# Altium PCB WPT_FPC_XCM_Change(1)(1).pcbdoc
Units mil, origin at the board's own origin, x right, y up, seen from the top; angles counter-clockwise.
Board outline 236.22 x 785.32 mil, 4 copper layers (Top Layer, GND, PWR, Bottom Layer); 14 components, 13 nets, 35 pads, 32 vias.
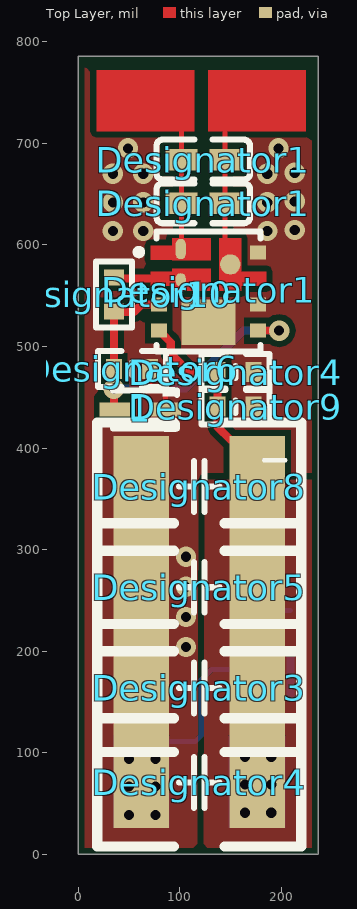
[diagram p0: Top Layer view]
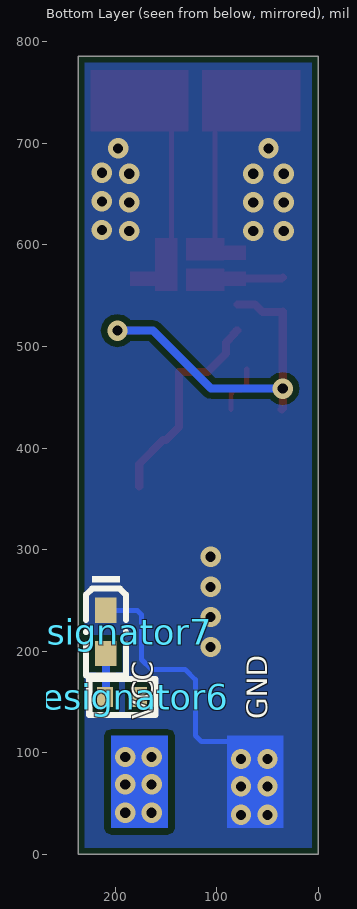
[diagram p1: Bottom Layer view, seen from below]
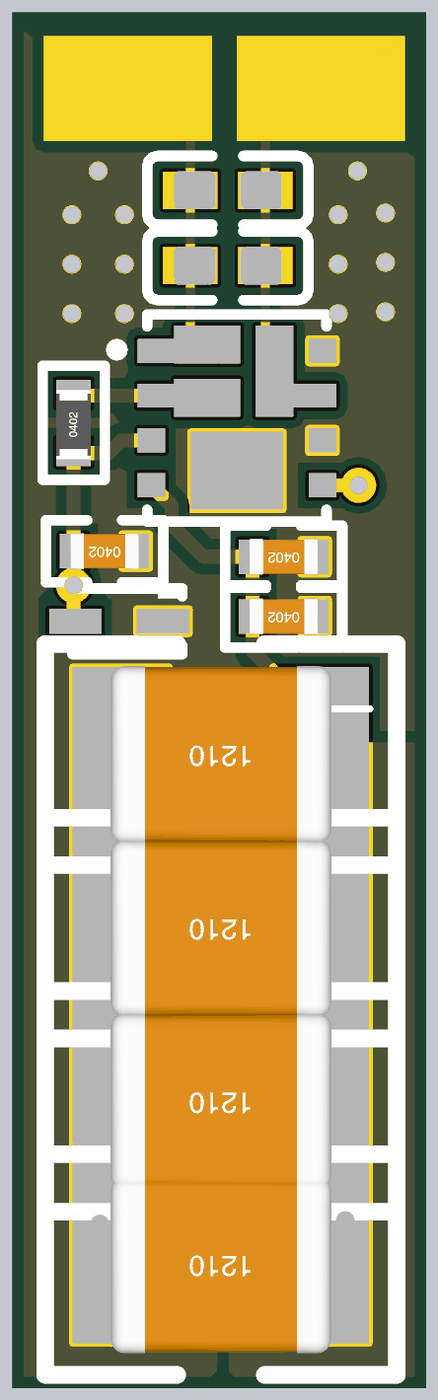
[diagram p2: 3D render of the assembled board from above, using the file's embedded part models]

## Layer stack, top to bottom
Top Solder Mask Layer: solder mask 0.4, Solder Resist, Dk 3.5
Top Layer: signal copper 1.4
Dielectric1: dielectric 12.6, FR-4, Dk 4.8
GND: signal copper 1.4
Dielectric2: dielectric 12.6, FR-4, Dk 4.8
PWR: signal copper 1.4
Dielectric3: dielectric 12.6, FR-4, Dk 4.8
Bottom Layer: signal copper 1.4
Bottom Solder Mask Layer: solder mask 0.4, Solder Resist, Dk 3.5

## Board outline
0,0.3 0,785.61 236.22,785.61 236.22,0.3

## Design rules (kind name [scope] priority, off if disabled: settings)
BoardOutlineClearance copperThickness1oz_1 [All] p1: gap=10 ignorepadtopadclearanceinfootprint=FALSE except(0: Arc-SplitContinuation Track-SplitContinuation SMDPad-SplitContinuation THPad-SplitContinuation Via-SplitContinuation Fill-SplitContinuation Poly-SplitContinuation Region-SplitContinuation Text-SplitContinuation; 6: Track-OutlineEdge Track-CutoutEdge SMDPad-OutlineEdge SMDPad-CutoutEdge THPad-OutlineEdge THPad-CutoutEdge Via-OutlineEdge Via-CutoutEdge Fill-OutlineEdge Fill-CutoutEdge Poly-OutlineEdge Region-OutlineEdge Region-CutoutEdge Text-OutlineEdge)
BoardOutlineClearance copperThickness2oz_1 [All] p2: gap=10 ignorepadtopadclearanceinfootprint=FALSE except(0: Arc-SplitContinuation Track-SplitContinuation SMDPad-SplitContinuation THPad-SplitContinuation Via-SplitContinuation Fill-SplitContinuation Poly-SplitContinuation Region-SplitContinuation Text-SplitContinuation; 6: SMDPad-CutoutEdge THPad-CutoutEdge Via-CutoutEdge Fill-CutoutEdge Region-CutoutEdge; 11.8: Track-OutlineEdge Track-CutoutEdge SMDPad-OutlineEdge THPad-OutlineEdge Via-OutlineEdge Fill-OutlineEdge Poly-OutlineEdge Region-OutlineEdge Text-OutlineEdge)
Clearance copperThickness1oz [(InNet('$1N494') OR InNet('ISET') OR InNet('GND') OR InNet('$1N455') OR InNet('IN2') OR InNet('$1N2160') OR InNet('IN1') OR InNet('VBAT') OR InNet('XCM_OUT') OR InNet('VIN') OR InNet('$1N3723') OR InNet('INPUT2') OR InNet('INPUT1'))] p1: gap=6 ignorepadtopadclearanceinfootprint=FALSE
Clearance copperThickness2oz [All] p2: gap=6 ignorepadtopadclearanceinfootprint=FALSE except(7: Arc-Arc Arc-Track Arc-SMDPad Arc-THPad Arc-Via Arc-Fill Arc-Poly Arc-Region Arc-Text Arc-Hole; 8: Track-Track; 11.8: Track-Region Poly-Region)
DiffPairsRouting differentialPair [All] p1: maxlimit=6 minlimit=6 mostfreqgap=6 toplayer_minwidth=5 toplayer_maxwidth=100 toplayer_prefwidth=10 midlayer1_minwidth=5 midlayer1_maxwidth=100 midlayer1_prefwidth=10 midlayer2_minwidth=5 midlayer2_maxwidth=100 midlayer2_prefwidth=10 bottomlayer_minwidth=5 bottomlayer_maxwidth=100 bottomlayer_prefwidth=10 maxuncoupledlength=10
PasteMaskExpansion pasteMaskExpansion [All] p1: expansion=0
PlaneConnect innerPlane [InNet('GND')] p1: planeconnectstyle=Direct reliefexpansion=20 reliefentries=4 reliefconductorwidth=10 reliefairgap=10
PolygonConnect copperRegion [All] p1: connectstyle=Direct reliefconductorwidth=10 reliefentries=4 polygonreliefangle="90 Angle" airgapwidth=10
RoutingVias viaSize [All] p1: holewidth=12 width=24 viastyle="Through Hole" minholewidth=11.8 minwidth=19.7 maxholewidth=248 maxwidth=393.7
SolderMaskExpansion solderMaskExpansion [All] p1: expansion=2 istentingtop=FALSE useseparateexpansions=TRUE expansionbottom=2 istentingbottom=FALSE
Width copperThickness1oz_2 [All] p1: maxlimit=100 minlimit=3 preferedwidth=10
Width copperThickness2oz_2 [All] p2: maxlimit=100 minlimit=8 preferedwidth=10
27 further rules are at their usual default settings.

## Components (designator, comment, footprint, x,y, rotation, side; value= is the part's Value field where it differs from the comment)
1 "SOD-523_L1.2-W0.8-LS1.6-RD" SOD-523_L1.2-W0.8-LS1.6-RD 61,438 r180 top
Designator1 "CL05A105KP5NNNC" C0402 123,640.92 r180 top (schematic designator C4)
Designator1 "CL05A105KP5NNNC" C0402 123,683.92 r180 top (schematic designator C8)
Designator1 "XCM414B033D2-G" USP-8B10_L2.9-W2.6-P0.65-BL-EP 128.17,555.76 r270 top (schematic designator U2)
Designator3 "Comment" "C 1210_L"#1 119.09,164 r180 top
Designator4 "Comment" "C 0402_L" 154.87,474.84 r180 top
Designator4 "Comment" "C 1210_L"#2 119.09,71 r180 top
Designator5 "Comment" "C 1210_L"#1 119.09,263 r180 top
Designator6 "Comment" "R 0402_L" 192,155 r0 bottom
Designator6 "Comment" "C 0402_L" 52.71,478 r180 top
Designator7 "LED0402-RD" LED0402-RD 209,219 r270 bottom
Designator8 "Comment" "C 1210_L"#1 119.09,362 r180 top
Designator9 "Comment" "C 0402_L" 154.87,440.76 r180 top
Designator10 "Comment" "R 0402_L" 35,550.29 r90 top

## Footprints (in the part's own frame and the unit in brackets; to place one, negate y for a bottom-side part, rotate by r counter-clockwise, add the part's x,y. Pads: shape width x height; smd on the part's side, far side on the other; paste and mask are expansions set on the pad)
C0402 [mm]
  rect 0.79x0.54 smd paste-100 mask+0.051: 1(-0.545,0) 2(0.545,0)
  silkscreen extent -1.17,-0.5 1.17,0.5
"C 0402_L" [mm] "无极性贴片电容         淘宝ID:黄晶宝石"
  rect 0.4x0.5 smd: 1(-0.45,0) 2(0.45,0)
  silkscreen extent -0.85,-0.45 0.85,0.45, body extent -0.5,-0.26 0.5,0.26, height 0.53
"C 1210_L"#1 [mil] "无极性贴片电容                                淘宝ID:黄晶宝石"
  rect 55x100 smd: 1(-57.09,0) 2(57.09,0)
  silkscreen extent -100,-63 100,63, body extent -63,-51 63,51, height 60
"C 1210_L"#2 [mil] "无极性贴片电容                                淘宝ID:黄晶宝石"
  rect 55x90 smd: 1(-57.09,0) 2(57.09,0)
  silkscreen extent -100,-63 100,63, body extent -63,-51 63,51, height 60
LED0402-RD [mm]
  rect 0.636x0.54 smd paste-100 mask+0.051: 1(-0.538,0) 2(0.538,0)
  silkscreen extent -1.39,-0.54 1.09,0.54
"R 0402_L" [mm] "1/16W贴片电阻     淘宝ID:黄晶宝石"
  rect 0.4x0.5 smd: 1(-0.4,0) 2(0.45,0)
  silkscreen extent -0.8,-0.45 0.85,0.45, body extent -0.5,-0.25 0.5,0.25, height 0.3
SOD-523_L1.2-W0.8-LS1.6-RD [mil]
  rect 30x14.17 smd: 1(-25,0) 2(25,0)
  silkscreen extent -36,-22 27,22
USP-8B10_L2.9-W2.6-P0.65-BL-EP [mm]
  oval 0.508x0.254 smd: 1(-1.02,-0.695)
  oval 0.33x0.254 smd: 2(-0.25,-0.695)
  rect 0.35x0.4 smd paste+0 mask+0.05: 3(0.37,-1.24) 4(1.02,-1.24) 5(1.02,1.24) 6(0.37,1.24) 8(-0.93,1.24)
  round 0.508 smd: 7(-0.635,0.545)
  rect 1.13x1.34 smd paste+0 mask+0.05: 9(0.81,0)
  Top Layer region: -0.455,1.44 -0.455,0.82 -1.295,0.82 -1.295,0.27 0.025,0.27 0.025,0.82 -0.105,0.82 -0.105,1.44 -0.455,1.44
  Top Layer region: -1.105,-1.44 -1.105,-0.91 -1.295,-0.91 -1.295,0.05 -0.745,0.05 -0.745,-0.91 -0.755,-0.91 -0.755,-1.44 -1.105,-1.44
  Top Layer region: -0.455,-1.44 -0.455,-0.91 -0.525,-0.91 -0.525,0.05 0.025,0.05 0.025,-0.91 -0.105,-0.91 -0.105,-1.44 -0.455,-1.44
  silkscreen extent -1.46,-1.82 1.54,1.3

## Via types
v1: diameter 20, hole 10, Top Layer to Bottom Layer, tented both sides, 30 vias
v2: diameter 20, hole 10, Top Layer to Bottom Layer, 2 vias

## Nets (pads, with @x,y where several pads share a name; then routed paths per layer and width w, separated by ;. In a path a pad name is that pad's centre, name@x,y a point inside that pad or via, vN(x,y) a via of type N, cw(c..) or ccw(c..) an arc to the next point about the centre after c; other vN are vias at no path point)
$1N455: Designator6.2@209.71,155 Designator7.2
$1N494: 
$1N2160: 
$1N3723: 
GND: 1.1 Designator1.6 Designator1.8 Designator1.9 Designator3.2 Designator4.1@172.59,474.84 Designator4.2@62,71 Designator5.2 Designator6.1@70.43,478 Designator7.1 Designator8.2 Designator9.1 | length 282.9
  Top Layer w5: Designator6.1@70.43,478 70.43,462.57 76,457 82.78,457 86,453.78 1.1
  Bottom Layer w5: 88,111 115,111 121,117 121,172 131,182 164,182 174,192 174,236 178.19,240.19 Designator7.1
  other v1: 50,39 76,39 50,67 76,67 50,94 76,94 106,204.2 106,233.8 106,263.4 106,293 34,613.6 64,613.6 186,613.6 213,614.6 34,641.8 64,641.8 186,641.8 213,642.8 34,670 64,670 186,670 213,671 49,695 197,695
IN1: Designator1.1@100.81,595.91 Designator1.2@101.54,640.92 | length 77.5
  Top Layer w5: Designator1.1@101.54,605 101.54,640.92 101.54,682.46
IN2: Designator1.1@144.46,640.92 Designator1.7 | length 83
  Top Layer w5: 144.46,600 144.46,644.92 144.46,683
INPUT1: Designator1.2@101.54,683.92 | length 80.5
  Top Layer w5: 101.54,641.46 101.54,683.92 101.54,722
INPUT2: Designator1.1@144.46,683.92 | length 80.5
  Top Layer w5: 144.46,642.46 144.46,683.92 144.46,723
ISET: 
VBAT: 
VIN: 1.2 Designator1.2@100.81,565.59 Designator1.3 Designator1.5 Designator6.2@35,478 Designator10.1 Designator10.2 | length 418.4
  Top Layer w8: Designator10.2 36.2,566.8 99.88,566.8 100.81,565.87 Designator1.2@100.81,565.59 ; 1.2 35,439 v2(35,458.5) 35,478 Designator10.1 35.54,534 55,534 62.19,541.19 Designator1.3 ; Designator1.5 v2(197.65,515.59)
  Bottom Layer w8: v2(35,458.5) 105.5,458.5 162.59,515.59 v2(197.65,515.59)
XCM_OUT: Designator1.4 Designator3.1 Designator4.1@176.17,71 Designator4.2@137.16,474.85 Designator5.1 Designator6.1@176.25,155 Designator8.1 Designator9.2 | length 212.2
  Top Layer w8: Designator1.4 80.33,515.59 83.22,512.7 83.22,511.72 91,503.94 91,493 109.15,474.85 137.16,474.85 Designator9.2 137.16,420.92 150.08,408 152.67,408 176.17,384.5 Designator8.1
  other v1: 164,41 190,41 164,69 190,69 164,96 190,96
copper on no net: | length 44.3
  Bottom Layer w8: 209,199 209,155.72 209.71,155

## Polygon pours and split planes (outlines as drawn)
GND on Top Layer "NONET_L-01_P-001" (solid, remove dead copper, pour order 5): 0,786 236.22,786 236.22,-1.4 0,-1.4
XCM_OUT on Top Layer "NONET_L-01_P-001" (solid, pour order 4): 124.56,369 236.22,369 236.22,0.3 224.7,0.3 123.44,0.3
GND on Bottom Layer "GND_L04_P001" (solid, remove dead copper, pour order 1): 0,787.7 236.22,787.7 236.22,0.3 0,0.3

## Other copper
Top Layer:
  region net INPUT1: 18,772 114,772 114,712 18,712
  region net INPUT2: 128,772 224,772 224,712 128,712
Bottom Layer:
  rectangle net XCM_OUT: 148,26 204,117
  rectangle net GND: 34,26 90,117

## Silkscreen, mask and mechanical layers (free items; w line width, h text height)
Top Silkscreen Layer:
  lines w4: 182.98,388 204,388
Bottom Silkscreen Layer:
  text "GND" at 50,133 h20 r270
  text "VCC" at 163,133 h20 r270
Top Solder Mask Layer:
  region: 128,772 224,772 224,712 128,712
  region: 18,772 114,772 114,712 18,712
Bottom Solder Mask Layer:
  rectangle: 148,26 204,117
  rectangle: 34,26 90,117
Mechanical 3:
  rectangle: 0,0.3 236.22,787.7
Mechanical 13:
  the board outline again, w4

## Dimensions
275.59,787.7 to 236.22,0.3 on Mechanical 13
0,785.61 to 236.22,785.61 on Mechanical 13